# Altium PCB MULTITESTCARD V1I1.PcbDoc (part 2 of 2)
Units mm, origin at the board's own origin, x right, y up, seen from the top; angles counter-clockwise.
Board outline 57.4 x 56.52 mm, 4 copper layers (L1, L2 (GND), L3, L4), stack 0.778 mm thick; 59 components, 82 nets, 287 pads, 101 vias.
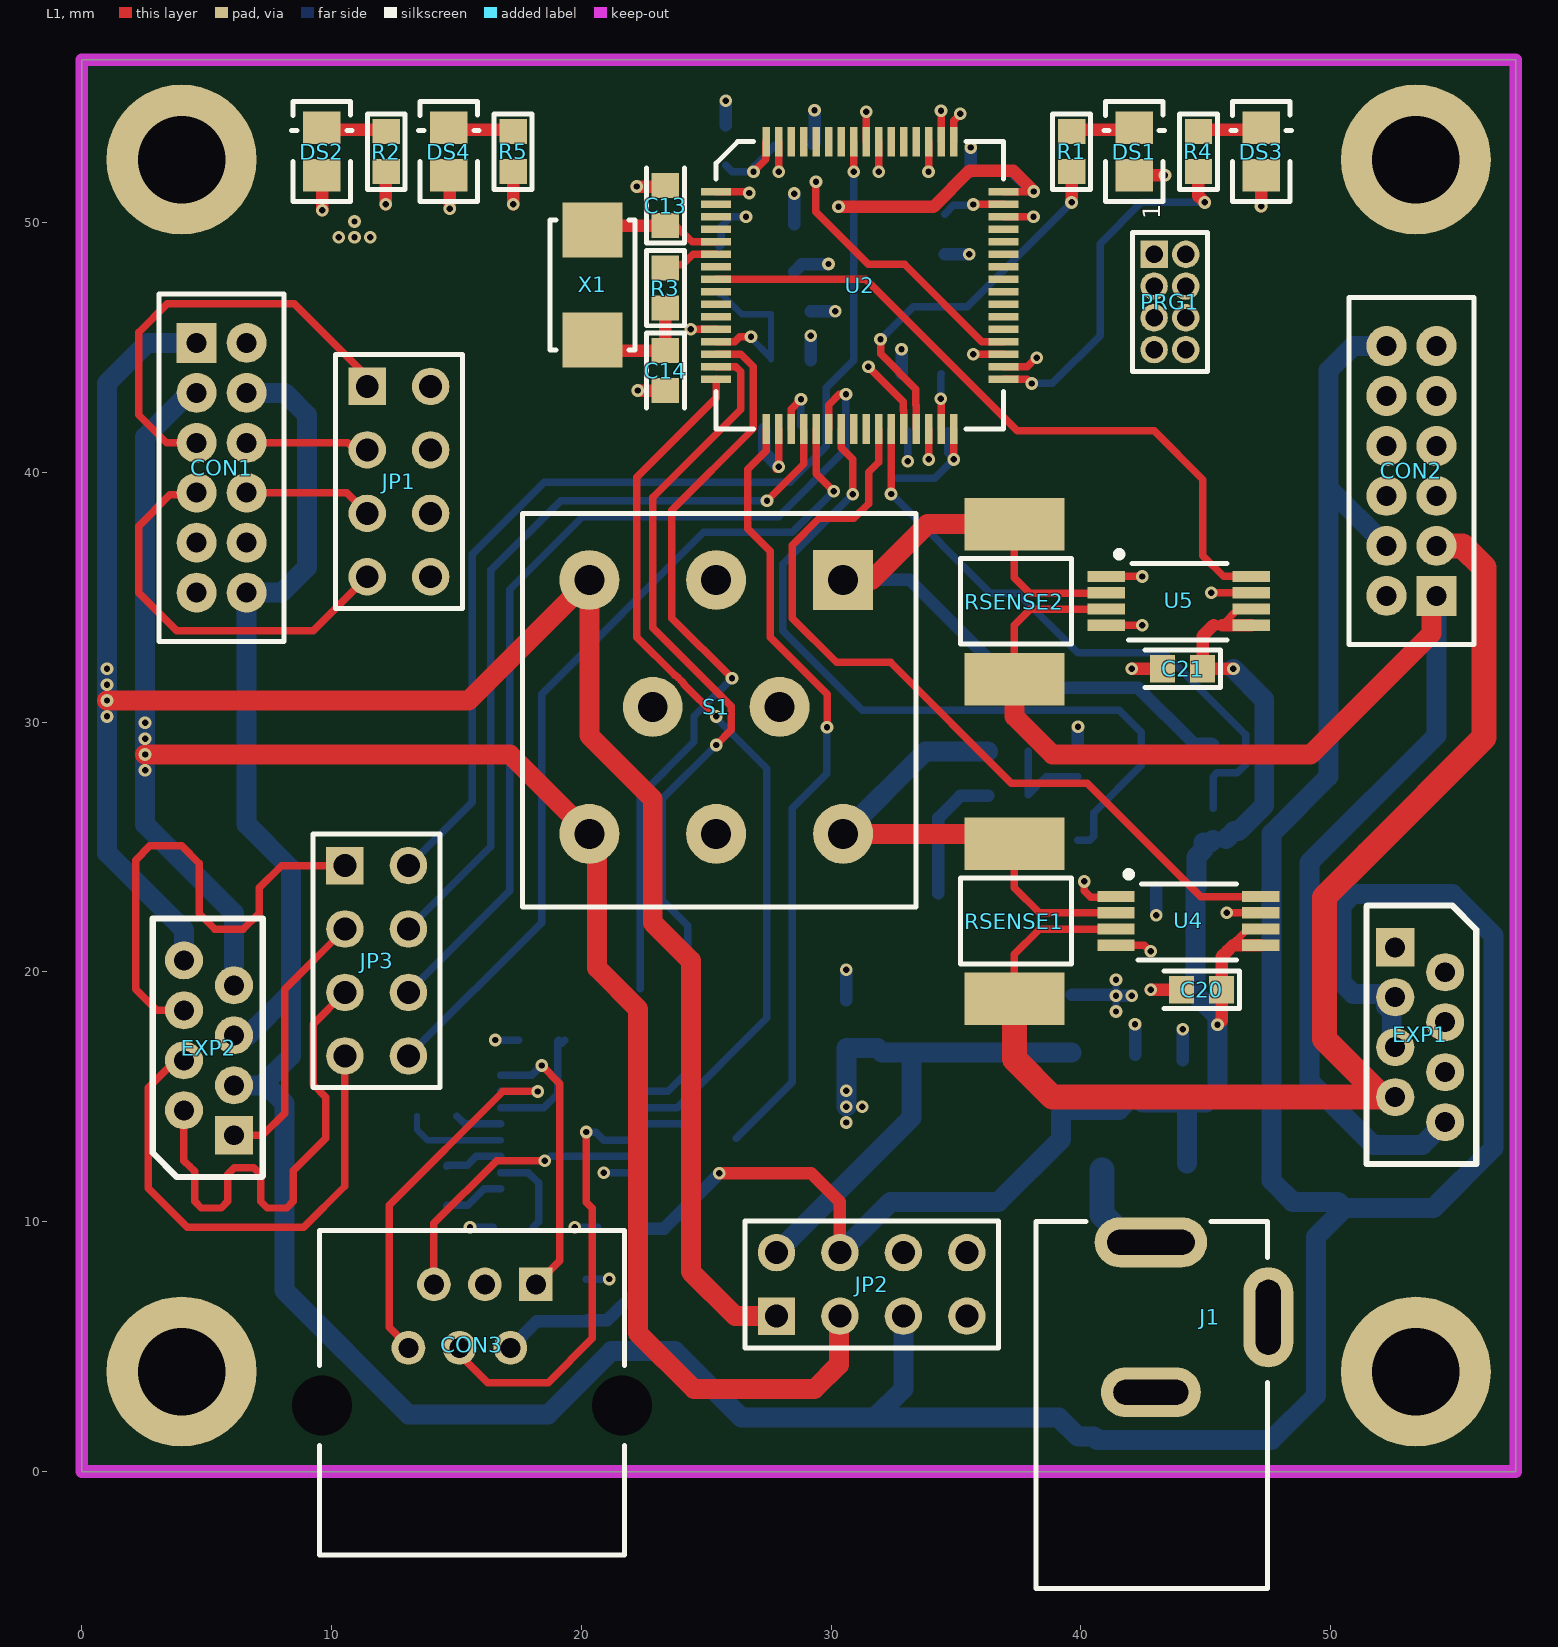
[diagram p0: L1 view]

## Part data (continued)
U1: library part LM1117MP-3.3/NOPB, "Space saving 800-mA low-dropout linear regulator with internal current limit 4-SOT-223 0 to 125", Case/Package=SOT-223, Current Rating=800mA, Dropout Voltage=1.2V, Manufacturer="TI National Semiconductor", Max Input Voltage=15V, Max Operating Temperature=125°C, Min Operating Temperature=0°C, Nominal Output Voltage=3.3V, Output Voltage Accuracy=1%, Package Quantity=1000, Quiescent Current=10mA, Supplier Part Number 1=LM1117MP-3.3/NOPBDKR-ND, Accuracy=1%, ComponentLink1Description=https://www.verical.com/server-webapp/html/getDatasheet?partID=112131&src-supplier=Verical, ComponentLink1URL=https://www.verical.com/server-webapp/html/getDatasheet?partID=112131&src-supplier=Verical, ComponentLink2Description=http://www.ti.com/lit/ds/symlink/lm1117-n.pdf?src-supplier=Avnet+Asia, ComponentLink2URL=http://www.ti.com/lit/ds/symlink/lm1117-n.pdf?src-supplier=Avnet+Asia, ComponentLink3Description=http://www.ti.com/lit/ds/symlink/lm1117.pdf?src-supplier=Digi-Key, ComponentLink3URL=http://www.ti.com/lit/ds/symlink/lm1117.pdf?src-supplier=Digi-Key, ComponentLink4Description=http://www.ti.com/lit/ds/symlink/lm1117-n.pdf?src-supplier=Avnet+Europe, ComponentLink4URL=http://www.ti.com/lit/ds/symlink/lm1117-n.pdf?src-supplier=Avnet+Europe, ComponentLink5Description=https://www.distrelec.com/ishop/Datasheets/lm1117_eng_tds.pdf?src-supplier=Distrelec, ComponentLink5URL=https://www.distrelec.com/ishop/Datasheets/lm1117_eng_tds.pdf?src-supplier=Distrelec, Height=1.6mm, Lead Free="Lead Free", Length=6.5mm, Manufacturer Part Number=LM1117MP-3.3/NOPB, Max Output Current=800mA, Min Current Limit=800mA, Mount="Surface Mount", Number of Outputs=1, Number of Pins=4, Number of Regulators=1, Output Current=800mA, Output Type=Fixed, Output Voltage=3.3V, Packaging="Tape and Reel", Polarity=Positive, Pricing 1="1=1.14, 10=1.015, 100=0.7912, 500=0.6536 (USD)", Radiation Hardening=No, REACH SVHC="No SVHC", Stock 1=43034, Supplier 1=Digi-Key, Width=3.56mm
U2: "MCU 32-bit STM32 ARM Cortex M3 RISC 256KB Flash 2.5V/3.3V 64-Pin LQFP Tray", Case/Package=LQFP, Frequency=120MHz, Manufacturer=STMicroelectronics, Max Operating Temperature=85°C, Max Power Dissipation=444mW, Max Supply Voltage=3.6V, Min Operating Temperature=-40°C, Min Supply Voltage=1.8V, Package Quantity=160, Supplier Part Number 1=497-11154-ND, ComponentLink1Description=http://www.farnell.com/datasheets/1776949.pdf?src-supplier=Element14, ComponentLink1URL=http://www.farnell.com/datasheets/1776949.pdf?src-supplier=Element14, ComponentLink2Description=http://www.st.com/web/en/resource/technical/document/datasheet/CD00237391.pdf?src-supplier=Future+Electronics, ComponentLink2URL=http://www.st.com/web/en/resource/technical/document/datasheet/CD00237391.pdf?src-supplier=Future+Electronics, ComponentLink3Description=http://www.st.com/web/en/resource/technical/document/datasheet/CD00237391.pdf?src-supplier=Avnet+Asia, ComponentLink3URL=http://www.st.com/web/en/resource/technical/document/datasheet/CD00237391.pdf?src-supplier=Avnet+Asia, ComponentLink4Description=http://www.produktinfo.conrad.com/datenblaetter/1000000-1099999/001075498-da-01-en-MCU_256KB_STM32F205RCT6_LQFP_64_STM.pdf?src-supplier=Conrad, ComponentLink4URL=http://www.produktinfo.conrad.com/datenblaetter/1000000-1099999/001075498-da-01-en-MCU_256KB_STM32F205RCT6_LQFP_64_STM.pdf?src-supplier=Conrad, Core Architecture=ARM, Data Bus Width=32b, Height=1.45mm, Interface=SDIO,I2C,SPI,USB,CAN,IrDA,MMC,UART,USART,LIN,I2S, Lead Free="Lead Free", Length=10.2mm, Manufacturer Part Number=STM32F205RCT6, Max Frequency=120MHz, Memory Size=256KB, Memory Type=FLASH, Number of ADC Channels=16, Number of Ethernet Channels=1, Number of I2C Channels=3, Number of I/Os=51, Number of Pins=64, Number of Programmable I/O=16, Number of PWM Channels=2, Number of SPI Channels=3, Number of Timers/Counters=14, Number of UART Channels=2, Number of USB Channels=2, Oscillator Type=Internal, Packaging=Tray, Peripherals="Brown-out Detect/Reset,POR,PWM,WDT,DMA,LCD,I2C", Pricing 1="1=7.79, 10=7.04, 160=5.8288, 640=5.0756, 1120=4.4207 (USD)", Radiation Hardening=No, RAM Size=100KB, REACH SVHC="No SVHC", Stock 1=1348, Supplier 1=Digi-Key, Watchdog Timer=Yes, Width=10.2mm
U3: "Operational Amplifier, Dual, 700 kHz, 2, 0.3 V/ s, 1.5V to 13V, SOIC, 8 ;RoHS Compliant: Yes", Case/Package=SOIC, Dual Supply Voltage=9V, Input Bias Current=250nA, Input Offset Voltage (Vos)=7mV, Manufacturer="Texas Instruments", Max Dual Supply Voltage=13V, Max Operating Temperature=125°C, Max Supply Voltage=26V, Min Dual Supply Voltage=1.5V, Min Operating Temperature=-40°C, Min Supply Voltage=3V, Nominal Supply Current=1.2mA, Operating Supply Current=1mA, Output Current=30mA, Package Quantity=1, Supplier Part Number 1=296-14596-1-ND, Voltage Gain=100dB, Bandwidth=700kHz, Common Mode Rejection Ratio=50dB, ComponentLink1Description=http://www.jameco.com/Jameco/Products/ProdDS/902371.pdf?src-supplier=Jameco, ComponentLink1URL=http://www.jameco.com/Jameco/Products/ProdDS/902371.pdf?src-supplier=Jameco, ComponentLink2Description=http://www.farnell.com/datasheets/2020388.pdf?src-supplier=Element14, ComponentLink2URL=http://www.farnell.com/datasheets/2020388.pdf?src-supplier=Element14, ComponentLink3Description=http://www.farnell.com/datasheets/1840278.pdf?src-supplier=Element14, ComponentLink3URL=http://www.farnell.com/datasheets/1840278.pdf?src-supplier=Element14, ComponentLink4Description=http://www.ti.com/lit/ds/symlink/lm258a.pdf?src-supplier=Digi-Key, ComponentLink4URL=http://www.ti.com/lit/ds/symlink/lm258a.pdf?src-supplier=Digi-Key, ComponentLink5Description=http://www.ti.com/general/docs/lit/getliterature.tsp?genericPartNumber=LM158A&&fileType=pdf&src-supplier=Avnet, ComponentLink5URL=http://www.ti.com/general/docs/lit/getliterature.tsp?genericPartNumber=LM158A&&fileType=pdf&src-supplier=Avnet, Gain Bandwidth Product=700kHz, Height=1.58mm, Lead Free="Lead Free", Length=4.9mm, Manufacturer Part Number=LM2904DR, Mount="Surface Mount", Number of Amplifiers=2, Number of Channels=2, Number of Circuits=2, Number of Elements=2, Number of Pins=8, Operating Supply Voltage=13V, Output Current per Channel=30mA, Packaging="Tape and Reel", Pricing 1="1=0.41, 10=0.305, 25=0.2752, 100=0.15, 250=0.145, 500=0.13, 1000=0.1 (USD)", Radiation Hardening=No, REACH SVHC="No SVHC", Slew Rate=0.3V/µs, Stock 1=117399, Supplier 1=Digi-Key, Unity Gain Bandwidth Product=700kHz, Width=3.91mm
U4 U5: library part INA240A1PWR, "IC AMP CURRENT SENSE 8-TSSOP", Case/Package=TSSOP, Input Bias Current=90uA, Input Offset Voltage (Vos)=5uV, Manufacturer="Texas Instruments", Max Operating Temperature=125°C, Min Operating Temperature=-40°C, Operating Supply Current=1.8mA, Supplier Part Number 1=296-45088-6-ND, -3db Bandwidth=400kHz, Lead Free="Lead Free", Manufacturer Part Number=INA240A1PWR, Mount="Surface Mount", Number of Circuits=1, Packaging="Tape and Reel", Pricing 1="1=2.65, 10=2.377, 100=1.9109, 500=1.57, 1000=1.3008 (USD)", Slew Rate=2V/µs, Stock 1=19787, Supplier 1=Digi-Key
U6: "IC DRVR/RCVR RS232 ESD 16-TSSOP", Case/Package=TSSOP, Manufacturer=STMicroelectronics, Max Operating Temperature=85°C, Max Supply Voltage=5.5V, Min Operating Temperature=-40°C, Min Supply Voltage=3V, Nominal Supply Current=1mA, Output Voltage=13.2V, Package Quantity=1, Supplier Part Number 1=497-6536-6-ND, ComponentLink1Description=http://www.st.com/content/ccc/resource/technical/document/datasheet/60/fc/e5/60/2c/24/41/88/CD00002950.pdf/files/CD00002950.pdf/jcr:content/translations/en.CD00002950.pdf?src-supplier=Digi-Key, ComponentLink1URL=http://www.st.com/content/ccc/resource/technical/document/datasheet/60/fc/e5/60/2c/24/41/88/CD00002950.pdf/files/CD00002950.pdf/jcr:content/translations/en.CD00002950.pdf?src-supplier=Digi-Key, ComponentLink2Description=http://www.st.com/web/en/resource/technical/document/datasheet/CD00002950.pdf?src-supplier=Mouser, ComponentLink2URL=http://www.st.com/web/en/resource/technical/document/datasheet/CD00002950.pdf?src-supplier=Mouser, ComponentLink3Description=http://www.farnell.com/datasheets/1689894.pdf?src-supplier=Element14, ComponentLink3URL=http://www.farnell.com/datasheets/1689894.pdf?src-supplier=Element14, ComponentLink4Description=http://www.st.com/web/en/resource/technical/document/datasheet/CD00002950.pdf?src-supplier=Future+Electronics, ComponentLink4URL=http://www.st.com/web/en/resource/technical/document/datasheet/CD00002950.pdf?src-supplier=Future+Electronics, Data Rate=250Kbps, Height=1.05mm, Interface=RS-232, Lead Free="Lead Free", Length=5.1mm, Logic Function=Receiver, Manufacturer Part Number=ST3232EBTR, Mount="Surface Mount", Number of Drivers=2, Number of Pins=16, Number of Receivers=2, Number of Transceivers=1, Number of Transmitters=2, Packaging="Tape and Reel", Pricing 1="1=1.35, 10=1.21, 100=0.9433, 500=0.7793, 1000=0.6152 (USD)", Radiation Hardening=No, REACH SVHC="No SVHC", Stock 1=24430, Supplier 1=Digi-Key, Width=4.48mm
X1: library part ABM3-25.000MHZ-D2Y-T, "CRYSTAL 25.0000MHZ 18PF SMD", Case/Package=CSMD, ESR (Equivalent Series Resistance)=30R, Frequency Stability=30ppm, Frequency Tolerance=20ppm, Load Capacitance=18pF, Manufacturer=Abracon, Max Operating Temperature=85°C, Min Operating Temperature=-40°C, Package Quantity=1000, Supplier Part Number 1=535-10645-6-ND, ComponentLink1Description=http://www.abracon.com/Resonators/abm3.pdf?src-supplier=Future+Electronics, ComponentLink1URL=http://www.abracon.com/Resonators/abm3.pdf?src-supplier=Future+Electronics, ComponentLink2Description=https://abracon.com/Resonators/abm3.pdf?src-supplier=Digi-Key, ComponentLink2URL=https://abracon.com/Resonators/abm3.pdf?src-supplier=Digi-Key, ComponentLink3Description=http://www.farnell.com/datasheets/1754353.pdf?src-supplier=Element14, ComponentLink3URL=http://www.farnell.com/datasheets/1754353.pdf?src-supplier=Element14, Composition=Ceramic, Depth=3.2mm, Frequency=25MHz, Height=0.051inch, Lead Free="Lead Free", Length=5mm, Manufacturer Part Number=ABM3-25.000MHZ-D2Y-T, Mount="Surface Mount", Number of Pins=2, Packaging="Tape and Reel", Pricing 1="1=0.73, 10=0.605, 50=0.5446, 100=0.484, 500=0.4598 (USD)", REACH SVHC=Yes, Series Resistance=30R, Stock 1=27285, Supplier 1=Digi-Key, Termination=SMD/SMT, Tolerance=20ppm, Width=3.2mm

## Free pads (board coordinates)
  round 6 hole 3.5: MH(4,4) MH(4,52.515) MH(53.404,52.515) MH(53.404,4)

## Via types
v1: diameter 0.508, hole 0.254, L1 to L4, tented both sides, 100 vias
v2: diameter 0.508/0.508/0.508/0.508 (per signal layer), hole 0.254, L1 to L4, tented both sides, 1 vias

## Nets (pads, with @x,y where several pads share a name; then routed paths per layer and width w, separated by ;. In a path a pad name is that pad's centre, name@x,y a point inside that pad or via, vN(x,y) a via of type N, cw(c..) or ccw(c..) an arc to the next point about the centre after c; other vN are vias at no path point)
+3V3: C1.1 C3.1 C4.1 C5.1 C6.1 C7.1 C8.1 DS1.2 DS2.2 DS3.2 DS4.2 I1.1 JP2.2 PRG1.1 PRG1.8 U1.2 U1.4 U2.1 U2.19 U2.32 U2.48 U2.64 | length 170
  L1 w0.3: U2.1 26.669,51.228 v1(26.722,51.174) ; v1(26.892,52.03) 27.392,52.53 U2.64@27.392,53.228 ; U2.19 28.4,42.529 v1(28.792,42.921) ; U2.32 34.9,40.522 v1(34.909,40.513) ; U2.48 v1@38.115,51.228
  L1 w0.5: DS2.2 9.652,51.847 9.631,51.826 v1(9.631,50.49) ; DS4.2 14.732,51.847 v1(14.732,50.546) ; v1(30.292,50.621) 34.092,50.621 35.541,52.07 37.282,52.07 v1(38.115,51.237) ; DS1.2@42.229,51.882 DS1.2 v1(43.361,51.882) ; v1(47.209,50.65) DS3.2
  L3 w0.8: v1(9.631,50.49) 9.629,50.489 9.629,49.507 9.525,49.403 ; v1(14.732,50.546) 13.589,49.403 ; v1(26.592,50.221) 25.774,49.403 ; v1(26.892,52.03) 26.722,51.86 v1(26.722,51.174) 26.648,51.174 26.596,51.226 26.088,51.226 24.377,49.515 24.377,49.403 ; 26.928,49.558 v1(28.524,51.153) ; v1(28.792,42.921) 28.792,42.923 28.595,43.12 28.595,44.118 27.792,44.921 27.792,48.694 27.083,49.403 ; v1(30.292,50.621) 29.074,49.403 27.083,49.403 ; v1(30.607,14.605) 24.95,14.605 21.013,10.668 20.193,10.668 3.429,10.668 1.524,12.573 1.524,22.987 5.461,26.924 5.461,31.369 1.651,35.179 1.651,45.974 4.064,48.387 8.509,48.387 9.525,49.403 ; 9.525,49.403 v1(10.287,49.403) v1(10.922,49.403) v1(11.557,49.403) 13.589,49.403 ; 13.589,49.403 24.377,49.403 ; 24.377,49.403 25.774,49.403 ; 25.774,49.403 26.774,49.403 27.083,49.403
  L4 w0.3: I1.1 25.592,49.082 25.592,49.821 25.992,50.221 v1(26.592,50.221) ; C4.1 26.037,52.03 v1(26.892,52.03) ; v1@26.932,52.252 27.726,53.045 C8.1 ; v1@28.792,42.769 28.792,41.879 C5.1@28.93,41.741 ; 32.639,39.751 34.147,39.751 v1(34.909,40.513) 34.909,40.547 34.671,40.785 C6.1 ; C7.1 37.192,51.971 v1@37.886,51.277
  L4 w0.5: C3.1@28.524,49.921 v1(28.524,51.153)
  L4 w0.8: JP2.2 33.224,14.174 U1.4 ; v1(30.607,14.605) C1.1 31.854,16.957 32.033,16.778 U1.4 ; U1.2 U1.4
  other v1: 30.607,13.97 31.242,14.605 30.607,15.24 10.922,50.038
+3V3IN: CON1.1 EXP2.8 JP2.1 S1.3 | length 83.5
  L1 w0.8: v1(1.016,30.861) 1.651,30.861 15.494,30.861 S1.3 20.32,29.464 22.86,26.924 22.86,21.971 24.384,20.447 24.384,8.001 26.162,6.223 JP2.1
  L4 w0.8: EXP2.8 4.096,21.685 1.016,24.765 1.016,43.561 2.634,45.179 CON1.1
  other v1: 1.016,30.226 1.016,31.496 1.016,32.131
+3V3OUT: CON2.1 EXP1.8 RSENSE2.1 U5.3 | length 56.9
  L1 w0.3: RSENSE2.1 37.338,33.879 37.973,34.514 U5.3@41.021,34.514
  L1 w0.8: RSENSE2.1 37.338,30.226 38.862,28.702 49.196,28.702 54.039,33.545 54.039,34.862 CON2.1
  L4 w0.8: CON2.1 54.229,29.464 49.149,24.384 49.149,15.621 51.689,13.081 53.673,13.081 EXP1.8
+3V3TEST: RSENSE2.2 S1.1 U3.5 U5.2 | length 31.4
  L1 w0.3: RSENSE2.2 37.338,35.784 37.958,35.164 U5.2@41.021,35.164
  L1 w0.8: S1.1 31.623,35.687 33.856,37.92 RSENSE2.2
  L4 w0.5: S1.1 33.147,35.687 37.465,31.369 42.291,31.369 44.522,29.138 45.233,29.138 U3.5
+5V: C2.1 C15.1 C20.1 C21.1 C22.1 CON3.2 D1.2 D2.2 D3.2 JP2.4 U1.3 U3.8 U4.5 U4.6 U5.5 U5.6 U6.16 | length 73.9
  L1 w0.3: 45.309,33.879 45.646,33.879 46.296,34.529 U5.6 ; 45.859,20.84 45.859,20.899 46.677,21.717 U4.6
  L1 w0.5: v1(25.527,11.938) 29.21,11.938 30.353,10.795 JP2.4 ; 45.309,33.879 44.869,33.439 C21.1 v1(46.101,32.131) ; v1(45.466,17.887) 45.631,18.053 45.631,19.285 45.631,20.612 45.859,20.84 46.086,21.067 U4.5 ; 45.646,33.879 U5.5
  L4 w0.254: U6.16@22.333,11.284 U6.16
  L4 w0.3: U6.16@22.263,11.214 U6.16@22.333,11.284
  L4 w0.5: CON3.2 18.216,6.008 D3.2 20.243,6.058 21.044,6.058 22.263,7.277 C15.1@22.263,9.729 ; U6.16@22.263,11.214 C15.1 C15.1@22.263,9.729 ; v1(25.527,11.938) 23.318,9.729 C15.1@22.263,9.729
  L4 w0.8: JP2.4 32.385,10.795 36.703,10.795 39.194,13.286 39.194,14.328 39.344,14.478 U1.3 41.517,14.478 42.114,15.075 C2.1 42.468,14.771 D2.2 44.997,14.771 45.466,15.24 v1(45.466,17.887) 45.466,18.218 44.577,19.107 C22.1@44.577,23.368 ; D1.2@44.245,12.332 D2.2@44.245,14.621 ; C22.1 44.615,24.6 44.914,24.898 44.914,25.178 45.193,25.178 U3.8 ; U3.8@45.813,25.328 46.123,25.638 46.311,25.638 47.336,26.663 47.336,30.896 v1(46.101,32.131)
+5V0: D1.1 J1.1 | length 4.2
  L4 w1: D1.1@40.845,12.065 40.845,10.285 41.955,9.175 J1.1
+5VIN: CON1.3 EXP2.7 JP2.3 S1.6 | length 77.5
  L1 w0.8: v1(2.54,28.702) 3.175,28.702 17.145,28.702 20.626,25.221 20.626,20.161 22.263,18.525 22.263,5.55 24.511,3.302 29.337,3.302 30.308,4.273 30.308,6.178 JP2.3 ; CON1.3@4.548,43.179 CON1.3
  L4 w0.8: CON1.3 4.317,43.179 2.54,41.402 2.54,25.908 6.096,22.352 EXP2.7
  other v1: 2.54,28.067 2.54,29.337 2.54,29.972
+5VOUT: CON2.3 EXP1.7 RSENSE1.1 U4.3 | length 52.1
  L1 w0.3: RSENSE1.1 37.338,20.701 38.354,21.717 U4.3
  L1 w1: RSENSE1.1 37.338,16.51 38.862,14.986 EXP1.7 52.478,15.086 51.97,15.086 49.741,17.315 49.741,22.987 51.476,24.722 56.134,29.38 56.134,36.195 55.277,37.052 CON2.3
+5VTEST: R6.1 RSENSE1.2 S1.4 U4.2 | length 20.9
  L1 w0.3: RSENSE1.2 37.338,23.368 38.339,22.367 U4.2
  L1 w0.8: S1.4 36.934,25.527 RSENSE1.2
  L4 w0.8: S1.4@30.913,25.527 S1.4 33.777,28.824 R6.1
+VDDA: C9.1 C10.1 I1.2 U2.13 | length 7
  L1 w0.3: U2.13 26.145,45.228 26.338,45.421 v1(26.792,45.421)
  L4 w0.254: I1.2 25.627,47.117 26.423,46.321 27.592,46.321 C10.1 27.592,44.574 v1@26.749,45.417 ; v1(26.792,45.421) v1@26.841,45.372
ADC_3V3_A: U2.8 U5.8 | length 28.1
  L1 w0.3: U2.8 31.385,47.728 37.457,41.656 42.926,41.656 44.874,39.708 44.874,36.66 45.705,35.829 U5.8
ADC_3V3_V: U2.27 U3.6 U3.7 | length 24.7
  L1 w0.3: v1(32.4,39.131) U2.27
  L4 w0.3: v1(32.4,39.131) 36.367,35.164 37.48,35.164 39.878,32.766 43.307,32.766 46.586,29.487 46.586,28.298 46.253,27.965 45.44,27.965 U3.6 U3.7
ADC_5V_A: U2.26 U4.8 | length 33.2
  L1 w0.3: U2.26 31.9,40.409 31.496,40.005 31.496,38.735 30.912,38.151 29.515,38.151 28.448,37.084 28.448,34.163 30.226,32.385 32.385,32.385 37.211,27.559 40.259,27.559 44.801,23.017 U4.8
ADC_5V_V: U2.23 U3.1 U3.2 | length 31.1
  L1 w0.3: U2.23 30.4,40.983 30.861,40.522 v1(30.861,39.116)
  L4 w0.3: v1(30.861,39.116) 28.067,36.322 28.067,33.655 31.242,30.48 41.529,30.48 42.418,29.591 42.418,28.277 40.503,26.361 40.503,25.428 40.348,25.273 U3.1
CTS_MCU_RTS_PC_RS232: CON3.1 U6.8 | length 11.3
  L1 w0.3: CON3.1 19.131,8.443 19.131,12.181 19.146,12.196 19.146,15.525 v1(18.415,16.256)
  L4 w0.3: U6.8 18.023,15.864 v1(18.415,16.256)
CTS_PORT: CON1.5 CON2.5 JP1.1 | length 88.5
  L1 w0.3: CON1.5 3.398,41.179 2.286,42.291 2.286,45.593 3.429,46.736 8.509,46.736 11.43,43.815 JP1.1
  L3 w0.3: JP1.1 8.636,40.64 8.636,33.401 11.367,30.67 16.7,30.67 19.431,27.94 52.07,27.94 56.134,32.004 56.134,38.354 55.436,39.052 CON2.5
GND: C1.2 C2.2 C3.2 C4.2 C5.2 C6.2 C7.2 C8.2 C9.2 C10.2 C11.2 C12.2 C13.2 C14.2 C15.2 C17.2 C19.2 C20.2 C21.2 C22.2 CON3.3 D2.1 D3.1 J1.2 J1.3 JP2.6 pad.MH PRG1.7 U1.1 U2.12 U2.18 U2.63 U3.4 U4.1 U4.4 U4.7 U5.1 U5.4 U5.7 U6.15 | length 44.2
  L1 w0.3: v1(24.384,45.72) 24.392,45.728 U2.12 ; v1@27.813,40.129 v1(27.9,40.216) U2.18 ; v1(27.9,52.03) U2.63 ; v1@40.172,23.582 v1(40.132,23.622) 40.132,23.241 40.386,22.987 41.372,22.987 U4.1 U4.1@40.877,23.017 ; U5.4 v1(42.448,33.879) ; U5.1 v1(42.448,35.829) ; U4.4 42.527,21.067 42.766,20.828 v1(42.799,20.828) ; v1(45.212,35.179) U5.7 ; v1(45.835,22.367) U4.7
  L1 w0.5: v1(22.225,51.435) 23.33,51.435 C13.2 ; v1(22.263,43.269) C14.2 C14.2@23.279,43.18 ; v1(42.037,32.131) C21.2 ; v1(42.799,19.285) C20.2
  L4 w0.3: v1(15.544,9.779) C17.2 ; v1(16.56,17.272) C19.2 ; v1(19.735,9.779) C15.2 ; D3.1 v1(21.121,7.708) ; v1(20.897,11.964) U6.15 ; v1@33.071,40.441 C6.2 ; v1(41.402,18.415) v1(41.402,19.05) v1(41.402,19.685)
  L4 w0.5: C4.2 v1(25.781,54.864) ; C5.2@27.33,41.741 27.33,40.786 v1(27.9,40.216) ; C3.2@28.524,48.021 28.833,48.33 29.89,48.33 v1(29.892,48.332) ; C10.2@29.178,44.482 v1@29.178,45.461 ; C9.2 v2(30.17,46.448) ; C8.2@29.288,53.133 29.337,53.183 v1(29.337,54.483) ; C1.2 v1(30.607,20.089) ; C11.2 v1(32.817,44.92) ; C12.2 v1(35.522,48.73) ; C7.2 v1(35.592,52.999) ; U1.1 v1@41.167,19.078 ; U3.4 v1(39.878,29.807) ; v1(41.402,19.05) v1(42.037,19.05) ; C2.2 v1(42.164,17.907) ; v1(43.015,22.263) C22.2 ; D2.1 v1(44.069,17.703)
  other v1: 33.062,40.441 29.178,45.461
IN1+: R6.2 R7.2 U3.3 | length 4
  L4 w0.3: R6.2 37.884,27.096 38.601,27.813 U3.3
JTCK/SWCLK: PRG1.6 U2.49 | length 23.3
  L1 w0.3: U2.49 34.9,54.077 v1(35.166,54.343)
  L3 w0.3: v1(35.166,54.343) 36.208,54.343 36.879,53.672 36.879,50.497 40.767,46.609 40.767,45.03 42.49,43.307 44.958,43.307 45.974,44.323 45.974,45.847 45.641,46.18 PRG1.6
JTDI: PRG1.4 U2.50 | length 27.1
  L1 w0.3: U2.50 v1(34.4,54.466)
  L3 w0.3: v1(34.4,54.466) 34.4,52.613 35.69,51.323 35.935,51.323 36.289,50.969 36.289,50.724 36.292,50.721 36.292,49.814 39.997,46.109 39.997,44.839 42.164,42.672 45.775,42.672 46.863,43.76 46.863,46.101 45.514,47.45 PRG1.4
JTDO/TRACESWO: PRG1.2 U2.55 | length 23.8
  L1 w0.3: v1(31.9,52.03) U2.55
  L3 w0.3: v1(31.9,52.03) 30.48,53.45 30.48,54.61 31.496,55.626 41.402,55.626 44.196,52.832 PRG1.2
JTMS/SWDIO: PRG1.5 U2.46 | length 7.7
  L1 w0.3: U2.46 v1(38.098,50.228)
  L3 w0.3: v1(38.098,50.228) 42.129,46.197 42.909,46.197 PRG1.5
LCD_D0: U2.9
LCD_D1: U2.10
LCD_D2: U2.11
LCD_D3: U2.24
LCD_D4: U2.25
LCD_D5: U2.37
LCD_D6: U2.38
LCD_D7: U2.39
LCD_E: U2.59
LCD_RS: U2.62
LCD_RW: U2.61
LED1: R1.2 U2.29 | length 15.3
  L1 w0.3: v1(31.978,45.321) 31.978,44.735 33.388,43.325 33.388,42.692 33.4,42.68 U2.29
  L1 w0.5: v1(39.624,50.8) R1.2
  L4 w0.3: v1(31.978,45.321) 31.992,45.321 33.292,46.621 35.445,46.621 v1(39.624,50.8)
LED1A: DS1.1 R1.1 | length 2.6
  L1 w0.5: R1.1 39.699,53.707 42.054,53.707 DS1.1
LED2: R2.2 U2.28 | length 33.5
  L1 w0.3: v1(31.492,44.221) 32.888,42.825 32.888,42.485 32.9,42.473 U2.28
  L1 w0.5: v1(12.174,50.722) R2.2@12.174,52.057
  L3 w0.3: v1(12.174,50.722) 13.003,50.722 16.383,54.102 27.811,54.102 31.492,50.421 31.492,46.788 30.692,45.988 30.692,45.021 v1(31.492,44.221)
LED2A: DS2.1 R2.1 | length 2.6
  L1 w0.5: DS2.1 9.692,53.707 12.117,53.707 R2.1
LED3: R4.2 U2.33 | length 14.6
  L1 w0.3: U2.33 37.85,43.728 v1(38.024,43.554)
  L1 w0.5: R4.2 44.704,51.054 v1(44.958,50.8)
  L4 w0.3: v1(38.024,43.554) 38.855,43.554 40.767,45.466 40.767,49.149 42.418,50.8 v1(44.958,50.8)
LED3A: DS3.1 R4.1 | length 2.6
  L1 w0.5: R4.1 44.779,53.707 47.134,53.707 DS3.1
LED4: R5.2 U2.36 | length 26
  L1 w0.3: v1(29.392,51.621) 29.392,50.421 31.492,48.321 32.937,48.321 36.03,45.228 U2.36
  L1 w0.5: v1(17.279,50.722) R5.2@17.279,52.057
  L3 w0.3: v1(17.279,50.722) 19.77,53.213 27.8,53.213 v1(29.392,51.621)
LED4A: DS4.1 R5.1 | length 2.6
  L1 w0.5: DS4.1 14.772,53.707 17.197,53.707 R5.1
NetC11_1: C11.1 U2.31 | length 2.2
  L1 w0.3: v1(34.391,42.943) 34.4,42.934 U2.31
  L4 w0.3: v1(34.391,42.943) 34.391,43.916 C11.1
NetC12_1: C12.1 U2.47 | length 2.5
  L1 w0.3: v1@35.685,50.728 U2.47
  L4 w0.3: C12.1 34.894,50.68 35.646,50.68 v1(35.685,50.719)
NetC14_1: C14.1 R3.1 X1.1 | length 4.9
  L1 w0.5: X1.1 20.876,44.869 C14.1 R3.1@23.368,46.698
NetC16_1: C16.1 U6.1 | length 2.5
  L4 w0.3: C16.1 14.643,10.668 15.462,10.668 16.108,11.314 U6.1
NetC16_2: C16.2 U6.3 | length 2.3
  L4 w0.3: C16.2 14.629,12.254 15.429,12.254 15.789,12.614 U6.3
NetC17_1: C17.1 U6.2 | length 3.5
  L4 w0.3: U6.2 17.881,11.964 18.288,11.557 18.288,9.995 C17.1
NetC18_1: C18.1 U6.4 | length 4.1
  L4 w0.254: C18.1 13.424,13.683 13.843,13.264 U6.4
NetC18_2: C18.2 U6.5 | length 1.9
  L4 w0.3: C18.2 15.334,13.914 U6.5
NetC19_1: C19.1 U6.6 | length 4.8
  L4 w0.3: U6.6 18.501,14.564 19.05,15.113 19.05,17.234 C19.1 ; C19.1@19.215,17.145 C19.1@19.342,17.272
NJTRST: PRG1.3 U2.56 | length 17.7
  L1 w0.3: U2.56 v1(31.4,54.426)
  L3 w0.3: v1(31.4,54.426) 31.439,54.426 32.131,55.118 37.211,55.118 40.311,52.018 40.311,49.351 42.162,47.5 42.876,47.5 PRG1.3
OSC_IN: C13.1 U2.5 X1.2 | length 5.3
  L1 w0.3: C13.1 23.787,49.873 24.432,49.228 U2.5
  L1 w0.5: X1.2 20.622,49.873 C13.1
OSC_OUT: R3.2 U2.6 | length 2.2
  L1 w0.3: R3.2@23.368,48.298 24.041,48.298 24.471,48.728 U2.6
RTS_MCU_CTS_PC_RS232: CON3.6 U6.7 | length 15.3
  L1 w0.3: CON3.6 13.081,5.02 12.319,5.782 12.319,10.668 16.865,15.214 v1(18.262,15.214)
  L4 w0.3: U6.7 v1(18.262,15.214)
RTS_PORT: CON1.6 CON2.6 JP1.3 | length 63.9
  L1 w0.3: CON1.6 10.654,41.179 10.71,41.124 11.2,41.124 JP1.3
  L3 w0.3: JP1.3 9.398,38.862 9.398,34.036 11.747,31.686 17.081,31.686 20.289,28.479 44.608,28.479 47.752,31.623 47.752,34.575 CON2.6
RX_MCU_TX_PC_RS232: CON3.4 U6.13 | length 17.4
  L1 w0.3: CON3.4 15.121,4.691 16.256,3.556 18.669,3.556 20.447,5.334 20.447,10.534 20.193,10.788 v1(20.193,13.589)
  L4 w0.3: v1(20.193,13.589) 20.574,13.589 20.899,13.264 U6.13
RX_PORT: CON1.8 CON2.8 JP1.5 | length 56
  L1 w0.3: CON1.8 10.605,39.179 JP1.5
  L3 w0.3: JP1.5 10.033,36.957 10.033,34.544 11.938,32.639 37.592,32.639 46.005,41.052 CON2.8
SPI1_MISO: JP3.6 U2.22 | length 37.6
  L1 w0.3: U2.22 29.9,42.69 30.331,43.121 v1(30.592,43.121)
  L4 w0.3: JP3.6 17.145,23.241 17.145,35.306 20.066,38.227 27.905,38.227 30.592,40.914 v1(30.592,43.121)
SPI1_MOSI: JP3.2 U2.57 | length 42.1
  L1 w0.3: v1(30.9,52.03) 30.908,52.038 30.908,52.475 30.9,52.483 U2.57
  L4 w0.3: JP3.2 13.099,24.257 15.629,26.787 15.629,36.711 18.52,39.602 28.354,39.602 29.8,41.048 29.8,43.383 30.9,44.483 v1(30.9,52.03)
SPI1_NNS: JP3.4 U2.20 | length 31.4
  L1 w0.3: v1(27.432,38.862) 28.9,40.33 U2.20
  L4 w0.3: JP3.4 16.383,25.019 16.383,36.068 19.177,38.862 v1(27.432,38.862)
SPI1_SCK: JP3.8 U2.21 | length 34.5
  L1 w0.3: U2.21 29.4,39.942 v1(30.099,39.243)
  L4 w0.3: JP3.8 18.415,21.971 18.415,31.115 24.892,37.592 28.448,37.592 v1(30.099,39.243)
SPI_CS: EXP1.1 EXP2.1 JP3.3 | length 63
  L1 w0.3: EXP2.1 7.239,13.462 8.128,14.351 8.128,19.304 JP3.3
  L3 w0.3: JP3.3 8.509,23.749 8.509,25.4 9.906,26.797 14.224,26.797 20.193,20.828 37.465,20.828 38.227,21.59 43.942,21.59 44.546,20.986 EXP1.1
SPI_MISO: EXP1.2 EXP2.2 JP3.5 | length 81.9
  L1 w0.3: EXP2.2 4.096,12.446 4.318,12.224 4.529,12.013 4.529,10.813 4.792,10.55 5.582,10.55 5.845,10.813 5.845,11.893 6.108,12.157 6.898,12.157 7.161,11.893 7.161,10.813 7.424,10.55 8.214,10.55 8.477,10.813 8.477,12.033 9.779,13.335 9.779,14.986 9.271,15.494 9.271,17.907 JP3.5
  L3 w0.3: JP3.5 7.62,22.098 7.62,25.908 9.525,27.813 14.732,27.813 20.074,22.471 36.187,22.471 37.942,24.226 52.482,24.226 54.578,22.13 EXP1.2
SPI_MOSI: EXP1.6 EXP2.6 JP3.1 | length 75.8
  L1 w0.3: EXP2.6 3.001,18.462 2.159,19.304 2.159,24.474 2.73,25.046 4,25.046 4.699,24.347 4.699,22.352 5.334,21.717 6.477,21.717 7.112,22.352 7.112,23.368 8.001,24.257 JP3.1
  L3 w0.3: JP3.1 11.938,25.654 13.843,25.654 20.447,19.05 39.37,19.05 46.101,12.319 55.245,12.319 56.134,13.208 56.134,14.43 EXP1.6
SPI_SCK: EXP1.4 EXP2.4 JP3.7 | length 78.5
  L1 w0.3: EXP2.4 3.765,16.462 3.375,16.072 3.372,16.072 2.667,15.367 2.667,11.345 4.233,9.779 8.89,9.779 10.541,11.43 JP3.7
  L3 w0.3: JP3.7 12.446,14.732 15.748,14.732 18.288,17.272 33.909,17.272 40.132,11.049 55.245,11.049 56.769,12.573 56.769,16.764 55.614,17.919 54.645,17.919 EXP1.4
TX_MCU_RX_PC_RS232: CON3.5 U6.14 | length 11.8
  L1 w0.3: CON3.5 14.101,9.932 16.615,12.446 v1(18.542,12.446)
  L4 w0.3: v1(18.542,12.446) 18.598,12.446 18.766,12.614 U6.14
TX_PORT: CON1.7 CON2.7 JP1.7 | length 74.1
  L1 w0.3: CON1.7 4.515,39.09 3.53,39.09 2.286,37.846 2.286,35.179 3.81,33.655 9.271,33.655 JP1.7
  L3 w0.3: JP1.7 11.487,35.757 11.487,34.614 12.573,33.528 37.774,33.528 51.236,46.99 54.737,46.99 56.261,45.466 56.261,43.084 CON2.7
USART2_CTS: R9.1 U2.14 | length 30.5
  L1 w0.3: U2.14 26.392,44.728 26.892,44.228 26.892,41.751 23.622,38.481 23.622,34.163 v1(26.035,31.75)
  L4 w0.3: R9.1 22.352,27.051 24.511,29.21 24.511,30.226 v1(26.035,31.75)
USART2_CTS1: R9.2 U6.9 | length 1.9
  L4 w0.254: U6.9 22.333,17.701 R9.2
USART2_RTS: U2.15 U6.10 | length 35.7
  L1 w0.3: v1(25.4,29.083) 26.004,29.687 26.004,30.638 22.86,33.782 22.86,38.989 26.392,42.521 26.392,44.021 26.185,44.228 U2.15
  L4 w0.3: U6.10 23.469,15.214 24.257,16.002 24.257,21.844 23.241,22.86 23.241,26.924 v1(25.4,29.083)
USART2_RX: R8.1 U2.17 | length 31.5
  L1 w0.3: U2.17 27.4,40.862 26.655,40.117 26.655,37.734 27.559,36.83 27.559,33.401 29.845,31.115 v1@29.845,29.794
  L4 w0.3: R8.1 28.448,15.583 28.448,26.543 29.832,27.927 v1(29.832,29.794)
USART2_RX1: R8.2 U6.12 | length 2.5
  L4 w0.3: U6.12 24.071,13.914 24.6,13.385 R8.2
USART2_TX: U2.16 U6.11 | length 35.6
  L1 w0.3: v1(25.4,30.226) 24.129,31.497 ccw(c22.86,30.607) 23.75,31.876 22.225,33.401 22.225,39.804 25.4,42.979 U2.16
  L4 w0.3: U6.11 23.835,14.564 27.432,18.161 27.432,28.13 25.4,30.162 v1(25.4,30.226)
USART3_CTS: JP1.2 U2.34 | length 28.3
  L1 w0.3: U2.34 37.85,44.228 38.199,44.577 v1(38.227,44.577)
  L3 w0.3: JP1.2 16.256,43.434 17.526,42.164 31.239,42.164 34.874,45.799 35.814,45.799 37.036,44.577 v1(38.227,44.577)
USART3_RTS: JP1.4 U2.35 | length 24.5
  L1 w0.3: v1@35.685,44.728 U2.35
  L3 w0.3: JP1.4 16.184,40.894 16.811,41.521 31.592,41.521 34.79,44.719 v1(35.685,44.719)
USART3_RX: JP1.8 U2.30 | length 23.5
  L1 w0.3: v1@33.9,40.513 U2.30
  L3 w0.3: JP1.8 16.16,38.004 32.127,38.004 33.909,39.786 v1(33.909,40.513)
USART3_TX: JP1.6 U2.51 | length 41.3
  L1 w0.3: v1(33.9,52.03) U2.51
  L3 w0.3: JP1.6 14.295,38.354 14.653,38.712 14.709,38.712 16.637,40.64 25.527,40.64 25.908,41.021 31.799,41.021 31.895,41.117 35.159,41.117 35.636,40.64 36.576,40.64 39.497,43.561 39.497,45.466 38.235,46.728 36.185,46.728 33.9,49.013 v1(33.9,52.03)
USB_DM: U2.44
USB_DP: U2.45
USB_ID: U2.43
USB_VBUS: U2.42
VGND: CON1.4 CON1.12 CON2.4 CON2.12 EXP1.3 EXP1.5 EXP2.3 EXP2.5 JP2.5 R7.1 | length 182.4
  L4 w0.5: 34.29,23.152 34.29,26.162 35.174,27.046 R7.1
  L4 w0.8: EXP2.3 7.207,15.462 ; EXP2.5 6.667,17.462 8.382,19.177 ; CON1.4 8.129,43.179 9.017,42.291 9.017,36.195 8.001,35.179 CON1.12 6.604,25.908 8.382,24.13 8.382,19.177 ; JP2.5 32.893,3.302 31.75,2.159 ; EXP1.3@52.216,18.624 52.439,18.401 52.439,17.125 EXP1.5 ; CON2.4 49.911,39.37 ; CON2.12 50.894,45.052 49.911,44.069 49.911,39.37 ; EXP1.3 52.439,19.125 50.888,19.125 50.419,19.593 50.419,22.645 50.888,23.114 54.864,23.114 56.515,21.463 56.515,12.954 54.102,10.541 50.546,10.541 ; 7.207,15.462 7.398,15.462 8.128,14.732 8.128,7.239 13.081,2.286 18.669,2.286 21.209,4.826 23.749,4.826 26.416,2.159 31.75,2.159 ; 7.207,15.462 8.382,16.637 8.382,19.177 ; 31.75,2.159 39.116,2.159 39.878,1.397 40.513,1.397 40.64,1.27 47.625,1.27 49.403,3.048 49.403,9.398 50.546,10.541 ; 49.911,39.37 49.911,27.824 47.622,25.535 47.622,11.647 48.475,10.795 50.292,10.795 50.546,10.541
pads on no net: CON1.2 CON1.9 CON1.10 CON1.11 CON2.2 CON2.9 CON2.10 CON2.11 CON3.MH1 CON3.MH2 JP2.7 JP2.8 S1.2 S1.5 S1.L+ S1.L- U2.2 U2.3 U2.4 U2.7 U2.40 U2.41 U2.52 U2.53 U2.54 U2.58 U2.60

## Polygon pours and split planes (outlines as drawn)
VGND on L4 "VGND_L04_P006" (solid, remove dead copper, pour order 6): 0,48.387 13.589,48.387 13.589,15.24 46.719,15.24 46.719,48.387 57.404,48.387 57.404,0 0,0
VGND on L4 "VGND_L04_P008" (solid, remove dead copper, pour order 8): 26.2,0 26.2,28.956 48.26,28.956 48.26,0
+3V3 on L4 "+3V3_L04_P009" (solid, pour order 9): 0,56.515 0,39.116 57.404,39.116 57.404,56.515
+3V3 on L4 "+3V3_L04_P003" (solid, remove dead copper, pour order 3): 29.718,7.239 26.67,7.239 26.67,9.525 29.591,12.446 29.591,17.9 29.457,18.034 31.369,18.034 32.131,18.796 32.131,19.812 40.783,19.812 40.894,19.923 40.894,15.621 38.1,15.621 37.846,15.367 37.846,10.795 32.639,10.795 29.718,7.874
+5V on L4 "+5V_L04_P002" (solid, remove dead copper, pour order 2): 37.973,15.875 37.973,13.208 41.91,13.208 42.291,12.827 42.291,11.303 45.878,11.303 45.878,15.875
GND on L2 (GND) "GND_PLANE" (solid, pour order 0): 0,56.515 0,0 57.404,0 57.404,56.515

## Keep-outs
Keep-Out Layer:
  the board outline again, w0.508

## Silkscreen, mask and mechanical layers (free items; w line width, h text height)
Mechanical 5:
  the board outline again, w0.2

## Text inside footprints (layer, text, board x,y; h text height)
PRG1: Top Overlay "1" at 43.18,50.117 h0.7 r90